# Altium PCB USB-NORA-W1.PcbDoc (part 3 of 3)
Units mm, origin at the board's own origin, x right, y up, seen from the top; angles counter-clockwise.
Board outline 61.5 x 18 mm, 4 copper layers (Top Layer, Layer 2, Layer 3, Bottom Layer), stack 2.472 mm thick; 80 components, 75 nets, 307 pads, 219 vias.
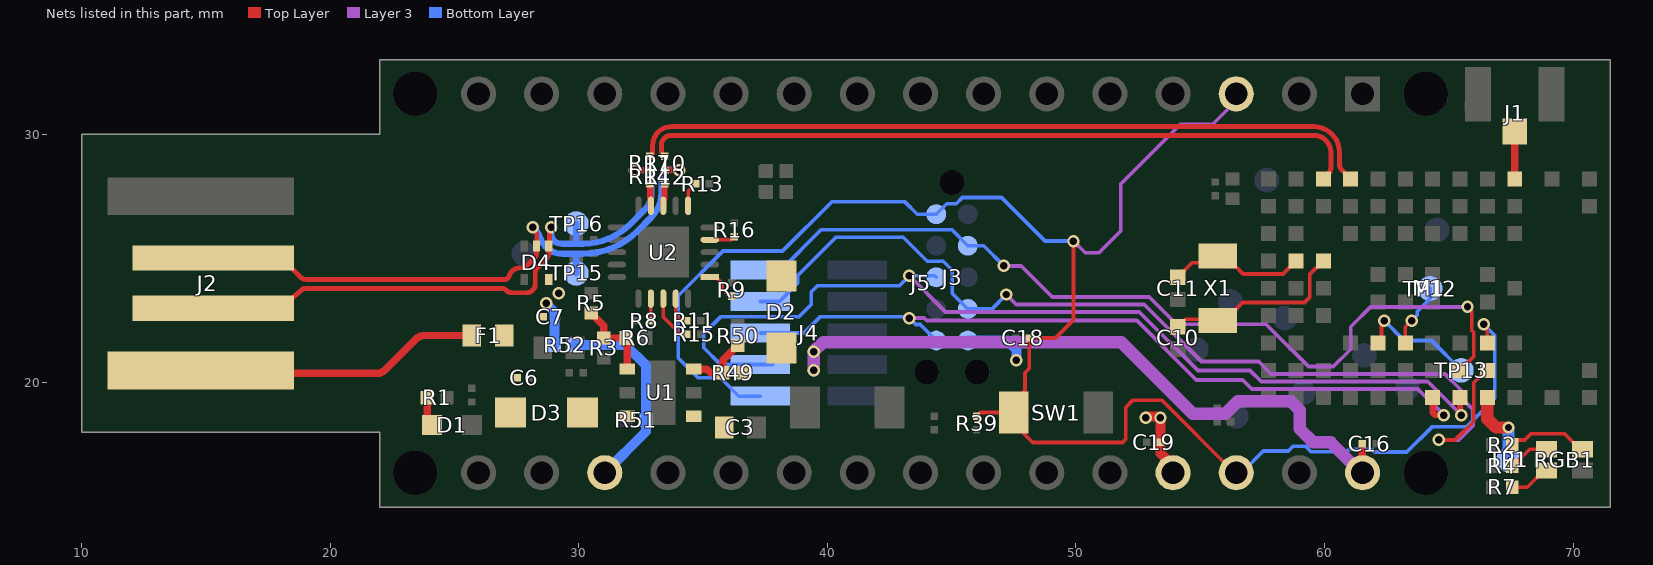
[diagram p4: the nets of this part, all layers, seen from the top]

## Via types
v1: diameter 0.5/0.5/0.5/0.5 (per signal layer), hole 0.3, Top Layer to Bottom Layer, tented both sides, 219 vias

## Nets (pads, with @x,y where several pads share a name; then routed paths per layer and width w, separated by ;. In a path a pad name is that pad's centre, name@x,y a point inside that pad or via, vN(x,y) a via of type N, cw(c..) or ccw(c..) an arc to the next point about the centre after c; other vN are vias at no path point) (continued)
GPIO47: M1.F3 TP12.1 | length 2.6
  Top Layer w0.15: M1.F3@63.25,21.6 63.25,22.25 v1(63.5,22.5)
  Bottom Layer w0.15: v1(63.5,22.5) 63.725,22.725 63.725,22.862 64.238,23.375 64.24,23.375 TP12.1@64.24,23.79
GPIO48: M1.E3 TP13.1 | length 4.9
  Top Layer w0.15: M1.E3@62.15,21.6 62.287,21.737 62.287,22.292 62.4,22.405 v1(62.4,22.5)
  Bottom Layer w0.15: v1(62.4,22.5) 63.2,21.7 64.3,21.7 TP13.1@65.5,20.5
IOREF: J5.18 R51.2 R52.2 | length 8.2
  Bottom Layer w0.4: R52.2@29.83,21.52 31.88,21.52 32.7,20.7 R51.2@32.7,18.5 32.7,18.032 J5.18@31.047,16.38
MTCK: J3.4 J4.4 M1.J2 | length 40.2
  Top Layer w0.15: v1(64.6,17.7) 65.25,17.7 66,18.45 66,20 66.275,20.275 66.325,20.275 66.5,20.45 M1.J2@66.5,20.5
  Layer 3 w0.15: v1(47.2,23.55) 47.6,23.15 52.75,23.15 55.05,20.85 57.35,20.85 57.85,20.35 64.85,20.35 65.5,19.7 65.5,19.4 65.975,18.925 65.975,18.275 65.4,17.7 v1(64.6,17.7)
  Bottom Layer w0.15: J4.4@37.3,23.27 38.07,23.27 38.8,24 38.8,24.3 40.35,25.85 43.05,25.85 44.015,24.885 44.665,24.885 45.025,24.525 45.025,23.595 J3.4@45.65,22.97 46.62,22.97 v1(47.2,23.55)
MTDI: J3.8 J4.8 M1.H1 | length 39.5
  Top Layer w0.25: M1.H1@65.45,19.4 65.45,18.75 v1(65.5,18.7)
  Layer 3 w0.15: v1(43.3,24.3) 44.75,22.85 52.55,22.85 54.907,20.493 57.007,20.493 57.45,20.05 64.15,20.05 v1(65.5,18.7)
  Bottom Layer w0.15: J4.8@37.8,20.73 35.698,20.73 35.025,21.403 35.025,21.975 35.7,22.65 38.85,22.65 39.35,23.15 39.35,23.65 39.6,23.9 42.9,23.9 v1(43.3,24.3) 44.32,24.3 J3.8@44.38,24.24
MTDO: J3.6 J4.6 M1.G1 | length 31.9
  Top Layer w0.25: M1.G1@64.35,19.4 64.35,18.8 64.45,18.7 v1(64.8,18.7)
  Layer 3 w0.15: v1(43.3,22.6) 43.9,22.6 44,22.5 52.45,22.5 54.835,20.115 56.71,20.115 57.075,19.75 63.75,19.75 v1(64.8,18.7)
  Bottom Layer w0.15: J4.6@37.3,22 39.05,22 39.7,22.65 43.25,22.65 v1(43.3,22.6) 43.555,22.345 43.735,22.345 44.256,21.824 J3.6@44.38,21.7
MTMS: J3.2 J4.2 M1.H2 | length 35.3
  Top Layer w0.15: M1.H2@65.45,20.5 66,21.05 66,22.028 65.925,22.103 65.925,22.875 v1(65.75,23.05)
  Layer 3 w0.15: v1(47.1,24.7) 47.8,24.7 49.05,23.45 52.95,23.45 54.05,22.35 57.65,22.35 59.35,20.65 60.35,20.65 61.05,21.35 61.05,22.25 61.85,23.05 v1(65.75,23.05)
  Bottom Layer w0.15: J4.2@37.8,24.54 38.14,24.54 39.75,26.15 45.01,26.15 J3.2@45.65,25.51 46.29,25.51 v1(47.1,24.7)
NetD1_1: D1.1 R1.1 | length 1.2
  Top Layer w0.3: R1.1@23.9,19.4 23.9,18.5 D1.1@24.1,18.3
NetR2_1: R2.1 RGB1.3 | length 3.3
  Top Layer w0.15: R2.1@67.55,17.5 67.55,17.515 67.735,17.7 68.05,17.7 68.3,17.95 69.65,17.95 70.275,17.325 RGB1.3@70.375,17.325
NetR3_2: R3.2 R5.2 R6.2 U1.4 | length 3.4
  Top Layer w0.3: R5.2@30.5,22.8 31,22.3 R3.2@31,21.8 R6.2@31.9,21.8 31.95,21.75 U1.4@31.95,20.55
NetR4_1: R4.1 RGB1.2 | length 1.7
  Top Layer w0.15: R4.1@67.55,16.65 67.575,16.65 68.25,17.325 RGB1.2@68.925,17.325
NetR7_1: R7.1 RGB1.1 | length 1.7
  Top Layer w0.15: R7.1@67.55,15.8 68.15,15.8 68.825,16.475 RGB1.1@68.925,16.475
NetR8_1: R8.1 U2.17 | length 0.9
  Top Layer w0.15: R8.1@32.9,22.5 U2.17@32.9,23.385
NetR9_1: R9.1 U2.1 | length 1.3
  Top Layer w0.15: U2.1@35.266,24.25 35.514,24.25 35.775,23.989 35.775,23.782 36.007,23.55 36.075,23.55 R9.1@36.15,23.475
NetR11_1: R11.1 U2.19 | length 1.2
  Top Layer w0.15: U2.19@33.9,23.385 33.9,22.72 34.12,22.5 R11.1@34.35,22.5
NetR13_1: R13.1 U2.6 | length 1
  Top Layer w0.15: U2.6@34.4,27.116 34.4,27.703 R13.1@34.7,28.003
NetR15_1: R15.1 U2.18 | length 2
  Top Layer w0.15: U2.18@33.4,23.385 33.4,22.64 34.09,21.95 R15.1@34.35,21.95
NetR16_1: R16.1 U2.4 | length 1
  Top Layer w0.15: U2.4@35.266,25.75 36.125,25.75 R16.1@36.25,25.875
NetR49_2: R49.2 R50.2 U1.3 | length 2.6
  Top Layer w0.3: U1.3@34.63,20.55 35.15,20.55 35.3,20.4 R49.2@35.8,20.4 35.8,20.9 35.9,21 R50.2@36.4,21.5
P_IN: C3.1 D2.C D3.C R49.1 U1.1 U1.6
RESET: C18.1 J3.10 J4.10 J5.3 J5.28 M1.J3 R39.1 SW1.1 | length 74.2
  Top Layer w0.15: R39.1@46,18.65 46.15,18.8 SW1.1@47.5,18.8 ; v1(49.9,25.7) 49.9,22.528 49.172,21.8 C18.1@48.125,21.8 48.125,20.575 47.95,20.4 47.95,19.7 47.5,19.25 SW1.1@47.5,18.8 ; J5.28@56.447,16.38 56.37,16.38 53.45,19.3 52.3,19.3 52,19 52,17.732 51.868,17.6 48.26,17.6 47.835,18.025 47.825,18.025 47.5,18.35 SW1.1@47.5,18.8 ; v1(66.4,22.35) 66.5,22.35 66.55,22.3 M1.J3@66.55,21.6
  Layer 3 w0.15: v1(49.9,25.7) 50.375,25.225 50.925,25.225 51.8,26.1 51.8,28 54.2,30.4 55.5,30.4 56.447,31.348 J5.3@56.447,31.62
  Bottom Layer w0.15: J4.10@37.3,19.46 36.44,19.46 35.7,20.2 34.8,20.2 34,21 34,23.5 35.8,25.3 38.2,25.3 40.175,27.275 43.125,27.275 43.62,26.78 J3.10@44.38,26.78 44.8,27.2 45.186,27.2 45.436,27.45 47,27.45 48.75,25.7 v1(49.9,25.7) ; J5.28@56.447,16.38 56.666,16.38 57.536,17.25 58.539,17.25 58.739,17.45 59.23,17.45 59.455,17.225 60.892,17.225 60.979,17.312 61.914,17.312 62.015,17.211 63.308,17.211 64.322,18.225 65.697,18.225 66.85,19.378 66.85,21.9 v1(66.4,22.35)
RF_PIN: J1.1 M1.K9 | length 1.9
  Top Layer w0.3: M1.K9@67.65,28.2 J1.1@67.65,30.1
USB_I_N: R14.2 U2.9 | length 0.9
  Top Layer w0.25: R14.2@32.85,28.003 32.875,27.978 32.875,27.382 32.9,27.357 U2.9@32.9,27.116
USB_I_P: R12.2 U2.8 | length 0.9
  Top Layer w0.25: U2.8@33.4,27.116 33.4,27.357 33.45,27.407 R12.2@33.45,28.003
USB_IOD_N: M1.D9 R17.1 | length 30.4
  Top Layer w0.2: R17.1@32.85,29.103 32.97,29.223 32.97,29.547 cw(c33.72,29.55) 33.72,30.3 59.576,30.3 cw(c59.573,29.273) 60.6,29.282 60.6,29.157 60.6,28.909 60.6,28.784 ccw(c60.9,28.784) 60.688,28.572 60.852,28.408 60.86,28.4 M1.D9@61.05,28.21
USB_IOD_P: M1.C9 R10.2 | length 29.2
  Top Layer w0.2: R10.2@33.45,29.103 33.4,29.153 33.393,29.161 cw(c33.62,29.357) 33.32,29.357 33.32,29.552 cw(c33.72,29.55) 33.718,29.95 59.573,29.95 cw(c59.572,29.272) 60.25,29.273 60.25,28.624 cw(c59.95,28.624) 60.228,28.51 60.22,28.492 cw(c60.035,28.568) 60.176,28.426 60.045,28.295 M1.C9@59.95,28.2
USB_N: D4.1 J2.2 R14.1 R17.2 TP16.1 | length 24.3
  Top Layer w0.2: J2.2@15.3,22.998 17.855,22.998 ccw(c17.855,23.297) 18.047,23.067 18.736,23.639 18.846,23.73 cw(c19.038,23.5) 19.038,23.8 26.876,23.8 cw(c26.876,23.5) 27.089,23.711 27.092,23.708 ccw(c27.304,23.92) 27.304,23.62 27.9,23.62 ccw(c27.9,23.97) 28.25,23.97 28.25,24.426 cw(c28.55,24.426) 28.337,24.637 28.713,25.013 ccw(c28.5,25.224) 28.8,25.224 D4.1@28.8,25.5 28.825,25.525 28.825,26.107 28.9,26.182 v1(28.9,26.25)
  Top Layer w0.25: v1(32.25,28.553) R14.1@32.85,28.553
  Bottom Layer w0.25: v1(28.9,26.25) 28.9,25.973 ccw(c29.275,25.973) 29.147,25.621 ccw(c29.323,26.108) 29.322,25.59 30.164,25.59 ccw(c30.163,28.298) 32.073,26.378 32.643,26.948 ccw(c31.944,27.644) 32.645,26.951 ccw(c31.944,27.644) 32.93,27.644 32.93,28.178 ccw(c32.555,28.178) 32.555,28.553 v1(32.25,28.553)
  Bottom Layer w0.254: 29.889,25.592 29.9,25.603 TP16.1@29.9,26.4
USB_P: D4.2 J2.3 R10.1 R12.1 TP15.1 | length 24.3
  Top Layer w0.2: J2.3@15.3,24.9 18.032,24.9 cw(c18.032,24.6) 18.245,24.812 18.692,24.365 18.809,24.247 ; 18.809,24.247 ccw(c19.021,24.46) 19.021,24.16 27.013,24.16 ccw(c27.013,24.36) 27.204,24.3 cw(c27.653,24.153) 27.276,24.438 cw(c27.653,24.153) 27.647,24.625 ccw(c27.636,25.08) 27.956,24.756 28.242,25.042 ccw(c28.1,25.183) 28.3,25.183 D4.2@28.3,25.5 ; D4.2@28.31,25.51 28.31,26.03
  Top Layer w0.25: R12.1@33.45,28.553 v1(34.05,28.553)
  Bottom Layer w0.25: v1(28.15,26.25) 28.299,26.101 cw(c28.033,25.836) 28.378,25.983 28.477,25.751 ccw(c29.323,26.108) 29.325,25.19 29.88,25.19 30.16,25.19 ; 30.161,25.19 ccw(c30.163,28.298) 32.356,26.096 32.927,26.667 ccw(c31.944,27.644) 32.928,26.668 ccw(c31.944,27.644) 33.33,27.644 33.33,28.195 cw(c33.705,28.195) 33.705,28.57 v1@34.033,28.57
  Bottom Layer w0.254: 29.88,25.188 29.9,25.168 TP15.1@29.9,24.4
VBUS: C6.1 C7.1 C19.1 D3.A D4.5 F1.1 J3.5 J5.27 R52.1 | length 7.4
  Top Layer w0.4: v1(52.8,18.6) 52.85,18.65 53.35,18.65 v1(53.4,18.6) C19.1@53.4,17.6 53.4,17.162 53.907,16.654 J5.27@53.907,16.38
  Bottom Layer w0.4: v1(28.7,23.2) 28.7,23.173 29.03,22.843 R52.1@29.03,21.52 ; J3.5@45.65,21.7 47.25,21.7 47.6,21.35 v1@47.6,20.927
  other v1: 47.6,20.9 29.2,23.6
VBUS_OUT: F1.2 J2.1 | length 11.5
  Top Layer w0.3: J2.1@14.795,20.384 21.898,20.384 ccw(c21.898,20.834) 22.215,20.515 23.469,21.769 cw(c23.786,21.45) 23.785,21.9 23.786,21.9 F1.2@25.7,21.9
VDD_SPI: M1.J1 TP1.1 | length 3.1
  Top Layer w0.5: M1.J1@66.55,19.4 66.55,18.55 66.9,18.2 v1(67.4,18.2)
  Bottom Layer w0.5: TP1.1@67.4,16.9 v1@67.4,18.173
VIN: C16.1 D2.A J5.30 | length 27.2
  Top Layer w0.3: C16.1@61.525,17.55 61.525,16.383 J5.30@61.527,16.38
  Top Layer w0.45: J5.30@61.46,16.38 J5.30@61.527,16.38
  Layer 3 w0.5: v1(39.45,20.5) v1(39.45,21.25) 39.825,21.625 51.825,21.625 54.7,18.75 56,18.75 56.5,19.25 58.65,19.25 59,18.9 59,18.15 59.55,17.6 60.25,17.6 61.47,16.38 J5.30@61.527,16.38
XTAL_32K_N: C11.1 M1.B6 X1.2 | length 5.6
  Top Layer w0.15: C11.1@54.1,24.25 54.682,24.832 55.432,24.832 X1.2@55.7,25.1 56.125,24.675 56.425,24.675 56.725,24.375 58.325,24.375 M1.B6@58.85,24.9
XTAL_32K_P: C10.1 M1.C6 X1.1 | length 7.5
  Top Layer w0.15: C10.1@54.1,22.25 54.4,22.55 55.65,22.55 X1.1@55.7,22.5 55.975,22.5 56.7,23.225 59.193,23.225 59.4,23.432 59.4,24.35 M1.C6@59.95,24.9
pads on no net: D4.4 J3.7 J3.9 J3.A J3.B J3.C J4.7 M1.A4 M1.B5 M1.B9 M1.C5 M1.D7 M1.G4 M1.G5 M1.G7 M1.J4 M1.J5 M1.J7 M1.K1 U2.2 U2.5 U2.7 U2.14 U2.15 U2.16

## Polygon pours and split planes (outlines as drawn)
GND on Top Layer "GND_TOP" (solid, remove dead copper, pour order 92): 18,28.25 18,26.75 22,26.75 22,17.9 22,15.189 71.395,15.189 71.395,32.939 22,32.939 22,29.9 22,28.25
3V3 on Top Layer "3V3_TOP_08" (solid, pour order 2): 46.2,25.2 46.05,25.05 42.3,25.05 40.9,26.45 40.9,27.05 41.25,27.4 45.3,27.4 45.8,27.9 52.2,27.9 52.425,27.675 56.56,27.675 56.785,27.45 58.05,27.45 58.05,26.67 58.27,26.45 59.15,26.45 59.15,25.651 59.149,25.65 56.9,25.65 56.58,25.97 52.23,25.97 52,26.2 48.9,26.2 47.9,25.2
VIN on Top Layer "VDD_SPI_L4_7" (solid, pour order 101): 37.55,24.925 37.55,23.65 39.05,22.15 39.05,20.45 39.25,20.25 39.8,20.25 40,20.45 40,22.4 38.75,23.65 38.75,24.925
P_IN on Top Layer "P_IN_TOP" (solid, pour order 8): 36.34,19.54 35.72,18.92 35.375,18.92 34.27,18.92 34.27,18.26 34.14,18.13 32.43,18.13 32.31,18.25 32.31,18.92 31.58,18.92 31.5,19 31.175,19 30.775,19.4 29.525,19.4 29.525,18.2 30.075,17.65 31.3,17.65 31.45,17.5 36,17.5 36.225,17.725 36.225,18.625 36.5,18.9 36.9,18.9 37.1,19.1 37.1,19.5 37.12,19.52 37.12,19.96 37.86,20.7 38.675,20.7 38.75,20.775 38.75,22.025 37.55,22.025 37.2,21.675 37.2,21.3 36.7,20.8 36.465,20.8 36.34,20.675
GND on Top Layer "VDD_SPI_L4_7" (solid, pour order 97): 28.975,22.8 29.8,22.8 30,22.6 30,22.3 29.8,22.1 29.3,22.1 28.925,21.725 28.925,20.875 29.1,20.7 29.625,20.7 29.775,20.55 29.775,20.175 28.9,19.3 28.6,19.3 27.9,20 27.9,21.575 28.325,22 28.5,22 28.975,22.475
VBUS on Top Layer "VDD_SPI_L4_7" (solid, pour order 96): 28.736,24.375 28.95,24.375 29.5,23.825 29.5,23.3 29.3,23.1 29.025,23.1 28.725,22.8 28.725,22.525 28.4,22.2 27.8,22.2 27.675,22.075 27.675,20.625 27.675,19.6 27.875,19.4 27.875,18.2 26.625,18.2 26.4,18.425 26.4,19.3 26.2,19.5 26.2,21.025 26.625,21.45 26.625,22.35 26.65,22.35 27.3,23 28,23 28.65,23.65 28.65,24.289
3V3 on Top Layer "3V3_TOP_01" (solid, pour order 6): 30.4,21.7 30.25,21.85 29.59,21.85 29.475,21.735 29.475,20.95 29.75,20.95 30,20.7 30,19.9 30.35,19.55 30.925,19.55 31.175,19.3 32.3,19.3 32.35,19.35 32.35,19.85 32.3,19.9 31.67,19.9 31.55,20.02 31.55,20.22 31.42,20.35 31.42,21.115 31.275,21.26 30.54,21.26 30.4,21.4
VBUS on Top Layer "VBUS_Arduino" (solid, pour order 27): 53.45,18.95 53.75,18.65 53.75,18.175 54.637,17.288 54.637,15 53.285,15 53.175,15.11 53.175,17.875 53.05,18 52.55,18 52.475,18.075 52.475,18.8 52.625,18.95
VBUS_OUT on Top Layer "VBUS_OUT" (solid, pour order 3): 23.75,20.9 25.525,20.9 26.075,21.45 26.075,22.425 26,22.5 21.95,22.5 20.7,21.25 18.057,21.25 18.057,19.75 22.6,19.75
3V3 on Top Layer "3V3_TOP_03" (solid, pour order 9): 31.5,29.1 31.25,29.35 29.8,29.35 29.25,28.8 29.25,28.25 30.2,27.3 30.185,26.615 29.6,26.03 29.6,25.44 30.23,25.44 30.34,25.55 30.8,25.55 30.879,25.629 31.831,25.629 31.91,25.707 31.91,26.47 32.18,26.74 32.45,26.74 32.52,26.81 32.52,27.42 32.45,27.49 32,27.49 31.5,27.99
GPIO38 on Top Layer "Top Layer-SPI-F_WP_NANO" (solid, pour order 91): 52.074,31.62 52.074,33 50.66,33 50.66,31.62
GPIO45/UART0-RTS on Top Layer "Top Layer-UART0-RTS_NANO" (solid, pour order 90): 31.754,31.62 31.754,33 30.34,33 30.34,31.62
GPIO14 on Top Layer "Top Layer-SPI-F_DQS_NANO" (solid, pour order 89): 44.454,31.62 44.454,33 43.04,33 43.04,31.62
GPIO43/UART0-TXD_NANO on Top Layer "Top Layer-UART0-TXD_NANO_IN" (solid, pour order 88): 62.234,31.62 62.234,33 60.82,33 60.82,31.62
GND on Top Layer "Top Layer-GND 1" (solid, pour order 87): 54.614,31.62 54.614,33 53.2,33 53.2,31.62
GPIO1/UART0-DTR on Top Layer "Top Layer-UART0-DTR_NANO" (solid, pour order 86): 36.834,31.62 36.834,33 35.42,33 35.42,31.62
GPIO33 on Top Layer "Top Layer-SPI-F_HD_NANO" (solid, pour order 85): 46.994,31.62 46.994,33 45.58,33 45.58,31.62
GPIO6/UART0-CTS on Top Layer "Top Layer-UART0-CTS_NANO" (solid, pour order 84): 34.294,31.62 34.294,33 32.88,33 32.88,31.62
GPIO37 on Top Layer "Top Layer-SPI-F_Q_NANO" (solid, pour order 83): 26.674,31.62 26.674,33 25.26,33 25.26,31.62
GPIO7/UART0-DSR on Top Layer "Top Layer-UART0-DSR_NANO" (solid, pour order 82): 39.374,31.62 39.374,33 37.96,33 37.96,31.62
RESET on Top Layer "Top Layer-RESET_N 1" (solid, pour order 81): 57.154,31.62 57.154,33 55.74,33 55.74,31.62
GPIO35 on Top Layer "Top Layer-SPI-F_D_NANO" (solid, pour order 80): 29.214,31.62 29.214,33 27.8,33 27.8,31.62
GPIO21 on Top Layer "Top Layer-GPIO21_NANO" (solid, pour order 79): 49.534,31.62 49.534,33 48.12,33 48.12,31.62
GPIO44/UART0-RXD_NANO on Top Layer "Top Layer-UART0-RXD_NANO_IN" (solid, pour order 78): 59.694,31.62 59.694,33 58.28,33 58.28,31.62
GPIO34 on Top Layer "Top Layer-SPI-F_CS0_NANO" (solid, pour order 77): 41.914,31.62 41.914,33 40.5,33 40.5,31.62
GPIO12 on Top Layer "Top Layer-SPI-F_IO6" (solid, pour order 61): 48.12,16.38 48.12,15 49.534,15 49.534,16.38
GND on Top Layer "Top Layer-GND" (solid, pour order 59): 58.28,16.38 58.28,15 59.694,15 59.694,16.38
GPIO13 on Top Layer "Top Layer-GPIO9" (solid, pour order 58): 37.96,16.38 37.96,15 39.374,15 39.374,16.38
GPIO36 on Top Layer "Top Layer-SPI-F_CLK_NANO" (solid, pour order 57): 25.26,16.38 25.26,15 26.674,15 26.674,16.38
GPIO18/I2C-SCL on Top Layer "Top Layer-I2C-SCL_NANO" (solid, pour order 56): 45.58,16.38 45.58,15 46.994,15 46.994,16.38
RESET on Top Layer "Top Layer-RESET_N" (solid, pour order 54): 55.74,16.38 55.74,15 57.154,15 57.154,16.38
GPIO4 on Top Layer "Top Layer-GPIO4" (solid, pour order 53): 32.88,16.38 32.88,15 34.294,15 34.294,16.38
GPIO9 on Top Layer "Top Layer-SPI-F_IO7" (solid, pour order 52): 35.42,16.38 35.42,15 36.834,15 36.834,16.38
GPIO17/I2C-SDA on Top Layer "Top Layer-I2C-SDA_NANO" (solid, pour order 51): 43.04,16.38 43.04,15 44.454,15 44.454,16.38
GPIO10 on Top Layer "Top Layer-SPI-F_IO4" (solid, pour order 50): 50.66,16.38 50.66,15 52.074,15 52.074,16.38
IOREF on Top Layer "Top Layer-IOREF" (solid, pour order 49): 30.341,16.38 30.341,15 31.755,15 31.755,16.38
GPIO11 on Top Layer "Top Layer-SPI-F_IO5" (solid, pour order 48): 40.5,16.38 40.5,15 41.914,15 41.914,16.38
VIN on Top Layer "Top Layer-VIN" (solid, pour order 47): 60.82,16.38 60.82,15 62.234,15 62.234,16.38
3V3 on Top Layer "3V3_TOP_02" (solid, pour order 7): 26.2,18.2 26.2,19.025 25.85,19.375 25.475,19.375 25.3,19.2 25.3,17.7 25.7,17.3 26.2,17.3 26.3,17.2 26.8,17.2 27.8,16.2 27.8,15 29.217,15 29.217,16.933 28.25,17.9 26.5,17.9
3V3 on Top Layer "3V3_TOP_04" (solid, pour order 10): 34.279,23.689 34.35,23.76 35.25,23.76 35.57,23.44 35.57,23.19 35.39,23.01 34.35,23.01 34.279,23.081 34.279,23.489
no net on Top Layer "Top Layer-No Net 1" (solid, pour order 60): 27.8,16.38 27.8,15 29.214,15 29.214,16.38
no net on Top plating "NONET_L-01_P-001" (solid): 10,30 10,18 18.6,18 18.6,26.716 18.6,30
GND on Layer 3 "GND_L3" (solid, remove dead copper, pour order 93): 22.035,29.9 10,29.9 10,17.9 22,17.9 22,17.707 22,15.175 22.035,15.14 71.285,15.14 71.285,32.89 22.035,32.89
3V3 on Layer 3 "VDD_SPI_L4_7" (solid, pour order 98): 31.5,29.4 31.7,29.2 31.7,28.3 35.1,24.9 38.75,24.9 41.15,27.3 46.9,27.3 47.25,26.95 47.25,26.25 46.05,25.05 41.85,25.05 39.6,22.8 34,22.8 29.2,27.6 29.2,28.9 29.7,29.4
VBUS on Layer 3 "VDD_SPI_L4_7" (solid, pour order 100): 52,20.75 51.55,21.2 46.45,21.2 46,20.75 44.05,20.75 42.85,19.55 33.7,19.55 29.3,23.95 28.5,23.95 27.8,23.25 27.8,21.05 30.85,18 47.15,18 48.15,19 49.85,19 50.5,18.35 53.7,18.35 53.85,18.5 53.85,18.9
GND on Bottom Layer "GND_BOT" (solid, remove dead copper, pour order 94): 22.055,17.955 22,17.9 22.055,17.9 22.055,15.1 71.305,15.1 71.305,32.85 22.055,32.85
3V3 on Bottom Layer "VDD_SPI_L4_7" (solid, pour order 95): 27.65,18.9 27,19.55 27,24.4 26.7,24.7 26.7,26.7 27.9,27.9 30.5,27.9 31.45,28.85 31.45,29.25 31.1,29.6 26.8,29.6 25,27.8 25,18.8 28.127,15.673 28.8,15.673 29.2,16.073 29.2,16.5 30.5,17.8 31.8,17.8 32.16,18.16 32.16,19.64 31.5,20.3 30.5,20.3 29.1,18.9
GPIO44/UART0-RXD_NANO on Bottom Layer "Bottom Layer-UART0-RXD_NANO_IN" (solid, pour order 68): 59.694,31.62 59.694,33 58.28,33 58.28,31.62
GPIO38 on Bottom Layer "Bottom Layer-SPI-F_WP_NANO" (solid, pour order 67): 52.074,31.62 52.074,33 50.66,33 50.66,31.62
GPIO21 on Bottom Layer "Bottom Layer-GPIO21_NANO" (solid, pour order 70): 49.534,31.62 49.534,33 48.12,33 48.12,31.62
GPIO33 on Bottom Layer "Bottom Layer-SPI-F_HD_NANO" (solid, pour order 74): 46.994,31.62 46.994,33 45.58,33 45.58,31.62
GPIO14 on Bottom Layer "Bottom Layer-SPI-F_DQS_NANO" (solid, pour order 64): 44.454,31.62 44.454,33 43.04,33 43.04,31.62
GPIO34 on Bottom Layer "Bottom Layer-SPI-F_CS0_NANO" (solid, pour order 69): 41.914,31.62 41.914,33 40.5,33 40.5,31.62
GPIO36 on Bottom Layer "Bottom Layer-SPI-F_CLK_NANO" (solid, pour order 33): 25.26,16.38 25.26,15 26.674,15 26.674,16.38
GPIO7/UART0-DSR on Bottom Layer "Bottom Layer-UART0-DSR_NANO" (solid, pour order 73): 39.374,31.62 39.374,33 37.96,33 37.96,31.62
GPIO6/UART0-CTS on Bottom Layer "Bottom Layer-UART0-CTS_NANO" (solid, pour order 66): 34.294,31.62 34.294,33 32.88,33 32.88,31.62
GPIO45/UART0-RTS on Bottom Layer "Bottom Layer-UART0-RTS_NANO" (solid, pour order 72): 31.754,31.62 31.754,33 30.34,33 30.34,31.62
GPIO1/UART0-DTR on Bottom Layer "Bottom Layer-UART0-DTR_NANO" (solid, pour order 63): 36.834,31.62 36.834,33 35.42,33 35.42,31.62
GPIO18/I2C-SCL on Bottom Layer "Bottom Layer-I2C-SCL_NANO" (solid, pour order 35): 45.58,16.38 45.58,15 46.994,15 46.994,16.38
GPIO17/I2C-SDA on Bottom Layer "Bottom Layer-I2C-SDA_NANO" (solid, pour order 44): 43.04,16.38 43.04,15 44.454,15 44.454,16.38
GPIO35 on Bottom Layer "Bottom Layer-SPI-F_D_NANO" (solid, pour order 76): 29.214,31.62 29.214,33 27.8,33 27.8,31.62
GND on Bottom Layer "Bottom Layer-GND" (solid, pour order 75): 54.614,31.62 54.614,33 53.2,33 53.2,31.62
RESET on Bottom Layer "Bottom Layer-RESET_N" (solid, pour order 71): 57.154,31.62 57.154,33 55.74,33 55.74,31.62
GPIO37 on Bottom Layer "Bottom Layer-SPI-F_Q_NANO" (solid, pour order 65): 26.674,31.62 26.674,33 25.26,33 25.26,31.62
GPIO43/UART0-TXD_NANO on Bottom Layer "Bottom Layer-UART0-TXD_NANO_IN" (solid, pour order 62): 62.234,31.62 62.234,33 60.82,33 60.82,31.62
GPIO4 on Bottom Layer "Bottom Layer-GPIO4" (solid, pour order 46): 32.88,16.38 32.88,15 34.294,15 34.294,16.38
VIN on Bottom Layer "Bottom Layer-VIN" (solid, pour order 45): 60.82,16.38 60.82,15 62.234,15 62.234,16.38
IOREF on Bottom Layer "Bottom Layer-IOREF" (solid, pour order 43): 30.34,16.38 30.34,15 31.754,15 31.754,16.38
GPIO10 on Bottom Layer "Bottom Layer-SPI-F_IO4" (solid, pour order 42): 50.66,16.38 50.66,15 52.074,15 52.074,16.38
GND on Bottom Layer "Bottom Layer-GND 1" (solid, pour order 41): 58.28,16.38 58.28,15 59.694,15 59.694,16.38
GPIO11 on Bottom Layer "Bottom Layer-SPI-F_IO5" (solid, pour order 40): 40.5,16.38 40.5,15 41.914,15 41.914,16.38
GPIO12 on Bottom Layer "Bottom Layer-SPI-F_IO6" (solid, pour order 39): 48.12,16.38 48.12,15 49.534,15 49.534,16.38
RESET on Bottom Layer "Bottom Layer-RESET_N 1" (solid, pour order 38): 55.74,16.38 55.74,15 57.154,15 57.154,16.38
3V3 on Bottom Layer "Bottom Layer-3V3" (solid, pour order 37): 27.8,16.38 27.8,15 29.214,15 29.214,16.38
GPIO9 on Bottom Layer "Bottom Layer-SPI-F_IO7" (solid, pour order 36): 35.42,16.38 35.42,15 36.834,15 36.834,16.38
GPIO13 on Bottom Layer "Bottom Layer-GPIO9" (solid, pour order 34): 37.96,16.38 37.96,15 39.374,15 39.374,16.38
VBUS on Bottom Layer "Bottom Layer-VBUS" (solid, pour order 32): 53.2,16.38 53.2,15 54.614,15 54.614,16.38
no net on Bottom Solder "NONET_L-01_P-001" (solid): 18.531,29.9 10,29.9 10,17.9 17.315,17.9 18.531,17.9
GPIO9 on Bottom Solder (solid): 35.42,16.38 35.42,15 36.834,15 36.834,16.38
no net on Bottom Solder (solid): 26.674,31.62 26.674,33 25.26,33 25.26,31.62
no net on Bottom Solder (solid): 29.214,31.62 29.214,33 27.8,33 27.8,31.62
no net on Bottom Solder (solid): 31.754,31.62 31.754,33 30.34,33 30.34,31.62
no net on Bottom Solder (solid): 34.294,31.62 34.294,33 32.88,33 32.88,31.62
no net on Bottom Solder (solid): 36.834,31.62 36.834,33 35.42,33 35.42,31.62
no net on Bottom Solder (solid): 39.374,31.62 39.374,33 37.96,33 37.96,31.62
no net on Bottom Solder (solid): 41.914,31.62 41.914,33 40.5,33 40.5,31.62
no net on Bottom Solder (solid): 44.454,31.62 44.454,33 43.04,33 43.04,31.62
no net on Bottom Solder (solid): 46.994,31.62 46.994,33 45.58,33 45.58,31.62
no net on Bottom Solder (solid): 49.534,31.62 49.534,33 48.12,33 48.12,31.62
no net on Bottom Solder (solid): 52.074,31.62 52.074,33 50.66,33 50.66,31.62
GND on Bottom Solder (solid): 54.614,31.62 54.614,33 53.2,33 53.2,31.62
RESET on Bottom Solder (solid): 57.154,31.62 57.154,33 55.74,33 55.74,31.62
no net on Bottom Solder (solid): 59.694,31.62 59.694,33 58.28,33 58.28,31.62
no net on Bottom Solder (solid): 62.234,31.62 62.234,33 60.82,33 60.82,31.62
VIN on Bottom Solder (solid): 60.82,16.38 60.82,15 62.234,15 62.234,16.38
GND on Bottom Solder (solid): 58.28,16.38 58.28,15 59.694,15 59.694,16.38
RESET on Bottom Solder (solid): 55.74,16.38 55.74,15 57.154,15 57.154,16.38
VBUS on Bottom Solder (solid): 53.2,16.38 53.2,15 54.614,15 54.614,16.38
GPIO10 on Bottom Solder (solid): 50.66,16.38 50.66,15 52.074,15 52.074,16.38
GPIO12 on Bottom Solder (solid): 48.12,16.38 48.12,15 49.534,15 49.534,16.38
no net on Bottom Solder (solid): 45.58,16.38 45.58,15 46.994,15 46.994,16.38
no net on Bottom Solder (solid): 43.04,16.38 43.04,15 44.454,15 44.454,16.38
GPIO11 on Bottom Solder (solid): 40.5,16.38 40.5,15 41.914,15 41.914,16.38
GPIO13 on Bottom Solder (solid): 37.96,16.38 37.96,15 39.374,15 39.374,16.38
GPIO4 on Bottom Solder (solid): 32.88,16.38 32.88,15 34.294,15 34.294,16.38
IOREF on Bottom Solder (solid): 30.341,16.38 30.341,15 31.755,15 31.755,16.38
3V3 on Bottom Solder (solid): 27.8,16.38 27.8,15 29.214,15 29.214,16.38
3V3 on Bottom Solder (solid): 25.26,16.38 25.26,15 26.674,15 26.674,16.38
no net on Top Solder "NONET_L-01_P-001" (solid): 10,29.9 18.5,29.9 18.5,17.9 10,17.9
GND on Top Solder (solid): 54.614,31.62 54.614,33 53.2,33 53.2,31.62
no net on Top Solder (solid): 49.534,31.62 49.534,33 48.12,33 48.12,31.62
no net on Top Solder (solid): 46.994,31.62 46.994,33 45.58,33 45.58,31.62
no net on Top Solder (solid): 44.454,31.62 44.454,33 43.04,33 43.04,31.62
no net on Top Solder (solid): 41.914,31.62 41.914,33 40.5,33 40.5,31.62
no net on Top Solder (solid): 36.834,31.62 36.834,33 35.42,33 35.42,31.62
no net on Top Solder (solid): 39.374,31.62 39.374,33 37.96,33 37.96,31.62
no net on Top Solder (solid): 34.294,31.62 34.294,33 32.88,33 32.88,31.62
no net on Top Solder (solid): 26.674,31.62 26.674,33 25.26,33 25.26,31.62
no net on Top Solder (solid): 31.754,31.62 31.754,33 30.34,33 30.34,31.62
no net on Top Solder (solid): 29.214,31.62 29.214,33 27.8,33 27.8,31.62
no net on Top Solder (solid): 62.234,31.62 62.234,33 60.82,33 60.82,31.62
no net on Top Solder (solid): 59.694,31.62 59.694,33 58.28,33 58.28,31.62
RESET on Top Solder (solid): 57.154,31.62 57.154,33 55.74,33 55.74,31.62
no net on Top Solder (solid): 52.074,31.62 52.074,33 50.66,33 50.66,31.62
3V3 on Top Solder (solid): 27.8,16.38 27.8,15 29.214,15 29.214,16.38
GPIO9 on Top Solder (solid): 35.42,16.38 35.42,15 36.834,15 36.834,16.38
GPIO13 on Top Solder (solid): 37.96,16.38 37.96,15 39.374,15 39.374,16.38
no net on Top Solder (solid): 43.04,16.38 43.04,15 44.454,15 44.454,16.38
no net on Top Solder (solid): 45.58,16.38 45.58,15 46.994,15 46.994,16.38
GPIO12 on Top Solder (solid): 48.12,16.38 48.12,15 49.534,15 49.534,16.38
GPIO10 on Top Solder (solid): 50.66,16.38 50.66,15 52.074,15 52.074,16.38
GPIO11 on Top Solder (solid): 40.5,16.38 40.5,15 41.914,15 41.914,16.38
VBUS on Top Solder (solid): 53.2,16.38 53.2,15 54.614,15 54.614,16.38
GND on Top Solder (solid): 58.28,16.38 58.28,15 59.694,15 59.694,16.38
VIN on Top Solder (solid): 60.82,16.38 60.82,15 62.234,15 62.234,16.38
RESET on Top Solder (solid): 55.74,16.38 55.74,15 57.154,15 57.154,16.38
GPIO4 on Top Solder (solid): 32.88,16.38 32.88,15 34.294,15 34.294,16.38
no net on Top Solder (solid): 25.26,16.38 25.26,15 26.674,15 26.674,16.38
IOREF on Top Solder (solid): 30.341,16.38 30.341,15 31.755,15 31.755,16.38
GND on Layer 2 "GND_L2" (solid, remove dead copper, pour order 26): 22.095,29.9 10,29.9 10,17.9 22,17.9 22,15 22.095,15.095 22.095,15.11 71.345,15.11 71.345,32.86 22.095,32.86

## Other copper
Top Layer:
  pour cut-out: 37.4,23.7 37.4,22.15 37.45,22.1 38.85,22.1 38.85,22.25
  pour cut-out: 64.35,25.55 64.35,24.35 65.85,24.35 65.85,25.55
  pour cut-out: 50.9,20.8 50.9,20.2 50.95,20.15 51.6,20.15 51.6,20.4 51.05,20.95
  pour cut-out: 50.35,25.55 50.45,25.45 50.45,22.35 50.05,22.35 50.05,22.4 50.05,25.45 50.15,25.55
  pour cut-out: 47.6,21.3 48,21.3 48,21.1 47.95,21.05 47.6,21.05
  pour cut-out: 35.286,28.153 35.289,28.15 37.25,28.15 37.25,27.15 36.75,26.65 36.35,26.65 35.85,27.15 35.85,27.75 35.3,27.75 35.25,27.8
  pour cut-out: 34.5,28.3 33.7,28.3 33.65,28.25 33.65,27.5 34.264,27.5 34.314,27.45 34.5,27.636
  pour cut-out: 36,21.91 37.135,21.91 37.375,22.15 37.6,22.15 37.123,21.673 37.05,21.673 37.05,21.3 36.875,21.125 36.025,21.125
  pour cut-out: 63,32.7 63.05,32.65 63.05,31.7 64.6,31.7 64.95,32.05 64.95,32.75 64.85,32.85 63.1,32.85
  pour cut-out: 33,22.2 33.578,22.2 34.1,21.678 34.1,20.99 34.472,20.618 35.604,20.618 36.226,21.24 36,21.466 36,22.9 35.8,23.1 35.6,22.9 33.15,22.9 33,22.75
  pour cut-out: 43.75,21.3 43.95,21.1 44.95,21.1 46.137,21.1 48.3,21.1 48.3,20.815 47.9,20.415 47.9,18.85 47.05,18 43.55,18 42.55,19 42.55,21 42.85,21.3
  pour cut-out: 64.2,17.43 63.63,17.43 63.05,16.85 63.05,15.4 63.25,15.2 64.75,15.2 65.35,15.8 65.35,17.3 65.2,17.45
  pour cut-out: 65.9,17.3 64.2,17.3 64.2,19.05 63.9,19.35 63.9,21.15 63.6,21.15 63.25,21.5 63.25,22.65 63.5,22.9 66.9,22.9 67,22.8 67,19.112 65.9,18.012 65.9,17.8
  pour cut-out: 58.4,17.8 58.579,17.8 59.95,17.8 60.45,18.3 63.05,18.3 63.7,18.95 63.7,20.95 61.5,20.95 61.5,21.65 61.2,21.95 60.1,21.95 59.9,21.75 59.9,20.05 58.7,20.05 58.4,19.75
  pour cut-out: 57,21.4 55.7,21.4 55.7,22.5 56.5,23.3 56.5,24.7 55.45,25.75 54.775,25.75 54.775,25.875 54.8,25.9 56.55,25.9 56.85,25.6 56.9,25.65 59.299,25.65 59.312,25.664 59.65,25.326 59.65,24.65 59.288,24.288 59.288,21.666 59.018,21.396
  pour cut-out: 26.012,22.65 26.75,22.65 26.75,22.55 26.55,22.35 26.55,21.5 26.05,21 26.05,20.75 25.55,20.75 25.5,20.8 26.15,21.45 26.15,22.512
  pour cut-out: 52.75,17.85 51.8,17.85 51.8,19.9 56.525,19.9 56.525,17.05 54.8,17.05 54.7,17.15 54.7,17.3 53.8,18.2 53.8,18.65 53.45,19 52.55,19 52.4,18.85 52.4,18.05 52.5,17.95 52.75,17.95
  pour cut-out: 69.42,17.8 69.54,17.8 69.54,17.78 69.86,17.46 69.86,16 69.44,16 69.44,17.75 69.42,17.77
  pour cut-out: 32.51,20.95 32.14,20.95 31.66,20.47 31.66,20.05 32.26,20.05 32.47,19.84 32.47,19.35 32.29,19.17 31.68,19.17 31.68,19.01 31.67,19 31.72,18.95 32.46,18.95 32.51,19
  pour cut-out: 34.139,23.01 35.552,23.01 35.732,23.19 35.69,23.232 35.69,23.542 35.783,23.542 36,23.325 36,22.9 35.7,22.6 35.1,22.6 35.05,22.65 34.15,22.65 33.921,22.879
  pour cut-out: 34.761,26.356 34.761,25.644 34.932,25.473 35.681,25.473 35.775,25.38 35.775,25.161 35.62,25.006 34.911,25.006 34.746,24.84 34.746,23.946 34.689,23.889 32.294,23.889 31.8,23.394 31.8,23.2 32.346,23.2 32.9,23.754 35.346,23.754 35.6,23.5 36.175,24.075 36.175,26.225 35.895,26.505 34.911,26.505
  pour cut-out: 32.4,26.746 34.64,26.746 34.485,26.59 32.463,26.59 32.45,26.578
  pour cut-out: 68.6,32.7 68.6,27.75 66.7,27.75 66.7,32.7
  pour cut-out: 61.7,26.925 61.975,26.65 65.743,26.65 66.7,27.607 66.7,30.15 62.5,30.15 61.7,29.35
  pour cut-out: 61.5,28.487 61.5,26.125 61.35,25.975 61.325,26 60.05,26 60.05,26.25 59.55,26.75 59.55,28
  pour cut-out: 24.5,15.25 24.5,17.2 24.5,17.35 23.975,17.35 22.25,17.35 22.25,15.25
  pour cut-out: 24.5,32.75 24.5,30.6 22.25,30.6 22.25,32.75
  text "1" at 23.35,26.15 h0.6
Layer 3:
  pour cut-out: 52.55,28.75 51.955,28.155 51.805,28.155 51.55,27.9 51.4,28.05 51.4,28.7 51.45,28.75
  pour cut-out: 65.8,24.45 66.15,24.1 66.15,22.95 63.7,20.5 55.3,20.5 53.2,22.6 53.2,24.35 54.25,25.4 58.6,25.4 59.35,24.65 60.849,24.65 61.003,24.496 61,24.492 61,24 61.8,23.2 65.45,23.2 65.4,23.25 65.4,24.1 65.38,24.1 65.3,24.18 65.3,24.45
  pour cut-out: 66.75,22.35 66.75,19.45 67.8,18.4 67.8,17.8 66.5,17.8 66.4,17.7 66.4,16.45 66,16.05 65.65,16.05 65.5,16.2 65.5,16.55 66.1,17.15 66.1,19.15 65.85,19.4 65.85,22.35
  text "3" at 23.25,26.15 h0.6
Layer 2:
  text "2" at 23.25,26.15 h0.6
Bottom Layer:
  pour cut-out: 43.7,24.15 43.7,22.38 44.13,21.95 44.8,21.95 44.8,24.131 44.772,24.159
  pour cut-out: 61.25,24.7 62.85,24.7 63.132,24.982 63.132,27.35 62,27.35 60.1,29.25 57.35,29.25 54.311,26.211 54.311,24.4 59.944,24.4 60.294,24.05 60.9,24.05 60.9,24.35
  pour cut-out: 65.6,23.35 65.6,23.75 66.25,23.75 67.05,22.95 67.05,21.378 66.822,21.15 64.65,21.15 63.65,22.15 63.65,22.9 64.1,23.35
  pour cut-out: 40,19 36.1,19 36.1,24.92 40.001,24.92
  text "4" at 23.25,26.15 h0.6

## Silkscreen, mask and mechanical layers (free items; w line width, h text height)
Top Overlay:
  text "X1" at 54.15,25.95 h0.8
  text "u" at 40.489,24.604 h3.81
  text "www.u-blox.com" at 44.1,23.55 h0.8
  text "USB-NORA-W1/2 vB" at 41,22.364 h0.8
  text "BOOT" at 39.85,20.8 h0.8
  text "RESET" at 48.1,20.5 h0.8
Bottom Overlay:
  lines w0.15: 42.25,17.85 41.6,17.2 ; 41.6,17.2 41.8,17.2 41.6,17.4 41.6,17.2
  text "3" at 67.15,31.15 h0.8 r270
  text "1" at 62.35,30.45 h0.8 r270
  text "15" at 24.35,29.85 h0.8 r270
  text "GND" at 53.55,28.35 h0.8 r270
  text "RST" at 55.85,28.35 h0.8 r270
  text "16" at 29.55,27.35 h0.8 r270
  text "GPIO1" at 35.65,27.15 h0.8 r270
  text "11" at 63.75,27.15 h0.8 r270
  text "GPIO6" at 33.15,26.85 h0.8 r270
  text "GPI07" at 38.15,26.85 h0.8 r270
  text "2" at 57.05,26.65 h0.8 r270
  text "GPIO21" at 48.45,26.35 h0.8 r270
  text "GPIO14" at 42.65,26.25 h0.8 r270
  text "GPIO34" at 40.75,26.15 h0.8 r270
  text "GPIO37" at 25.45,26.05 h0.8 r270
  text "GPIO35" at 27.95,26.05 h0.8 r270
  text "GPIO45" at 30.85,26.05 h0.8 r270
  text "GPIO33" at 46.45,26.05 h0.8 r270
  text "GPIO38" at 51.05,26.05 h0.8 r270
  text "7" at 56.15,24.25 h0.8 r270
  text "GPIO44/RX" at 58.75,23.65 h0.8 r270
  text "GPIO43/TX" at 60.85,23.622 h0.8 r270
  text "12" at 62.45,23.35 h0.8 r270
  text "15" at 29.55,22.25 h0.8 r270
  text "8" at 53.55,22.25 h0.8 r270
  text "9" at 61.55,22.15 h0.8 r270
  text "GND" at 27.45,22.05 h0.8 r270
  text "4" at 57.65,21.15 h0.8 r270
  text "5" at 63.15,20.75 h0.8 r270
  text "10" at 59.55,20.55 h0.8 r270
  text "6" at 56.45,19.65 h0.8 r270
  text "UBXH60-0000888" at 22.98,18.93 h0.8 r270
  text "13" at 65.15,18.25 h0.8 r270
  text "1" at 68.15,17.75 h0.8 r270
  text "GPIO4" at 33.45,17.45 h0.8 r270
  text "GPIO9" at 35,17.45 h0.8 r270
  text "GPIO36" at 25.4,17.4 h0.8 r270
  text "3V3" at 28.15,17.4 h0.8 r270
  text "IOREF" at 29.9,17.4 h0.8 r270
  text "GPIO18" at 46.65,17.4 h0.8 r270
  text "GPIO12" at 48.4,17.4 h0.8 r270
  text "GPIO10" at 50.9,17.4 h0.8 r270
  text "5V" at 52.9,17.4 h0.8 r270
  text "RST" at 54.65,17.4 h0.8 r270
  text "VIN" at 60.9,17.4 h0.8 r270
  text "GPIO13" at 38.93,17.387 h0.8 r270
  text "GPIO11" at 42.65,17.2 h0.8 r270
  text "16" at 24.258,17.119 h0.8 r270
  text "GND" at 57.59,17.01 h0.8 r270
  text "GPIO17" at 44.6,16.9 h0.8 r270
  text "30" at 62.296,16.873 h0.8 r270
Drill Guide:
  drawing of 347 lines, arcs and shapes, not listed
  text "Layer" at 24.068,113.076 h1.52
  text "Name" at 34.48,113.076 h1.52
  text "Material" at 68.253,113.076 h1.52
  text "Thickness" at 90.091,113.076 h1.52
  text "Constant" at 106.596,113.076 h1.52
  text "Board Layer Stack" at 121.071,113.076 h1.52
  text "Top Overlay" at 34.48,110.028 h1.52
  text "Top Solder" at 34.48,106.98 h1.52
  text "Solder Resist" at 68.253,106.98 h1.52
  text "0,40mil" at 90.091,106.98 h1.52
  text "3.5" at 106.596,106.98 h1.52
  text "Top Surface Finish" at 34.48,103.932 h1.52
  text "Nickel, Gold" at 68.253,103.932 h1.52
  text "0,16mil" at 90.091,103.932 h1.52
  text "1" at 24.068,100.884 h1.52
  text "Top Layer" at 34.48,100.884 h1.52
  text "CF-003" at 68.253,100.884 h1.52
  text "1,38mil" at 90.091,100.884 h1.52
  text "Dielectric 2" at 34.48,97.836 h1.52
  text "Prepreg 1080" at 68.253,97.836 h1.52
  text "7,09mil" at 90.091,97.836 h1.52
  text "3.77" at 106.596,97.836 h1.52
  text "2" at 24.068,94.788 h1.52
  text "Layer 2" at 34.48,94.788 h1.52
  text "CF-003" at 68.253,94.788 h1.52
  text "0,71mil" at 90.091,94.788 h1.52
  text "Dielectric10" at 34.48,91.74 h1.52
  text "Core-039" at 68.253,91.74 h1.52
  text "78,96mil" at 90.091,91.74 h1.52
  text "4.8" at 106.596,91.74 h1.52
  text "3" at 24.068,88.692 h1.52
  text "Layer 3" at 34.48,88.692 h1.52
  text "CF-003" at 68.253,88.692 h1.52
  text "0,71mil" at 90.091,88.692 h1.52
  text "Dielectric 7" at 34.48,85.644 h1.52
  text "Prepreg 1080" at 68.253,85.644 h1.52
  text "7,09mil" at 90.091,85.644 h1.52
  text "3.77" at 106.596,85.644 h1.52
  text "4" at 24.068,82.596 h1.52
  text "Bottom Layer" at 34.48,82.596 h1.52
  text "CF-003" at 68.253,82.596 h1.52
  text "1,38mil" at 90.091,82.596 h1.52
  text "Bottom Surface Finish" at 34.48,79.548 h1.52
  text "Nickel, Gold" at 68.253,79.548 h1.52
  text "0,16mil" at 90.091,79.548 h1.52
  text "Bottom Solder" at 34.48,76.5 h1.52
  text "Solder Resist" at 68.253,76.5 h1.52
  text "0,40mil" at 90.091,76.5 h1.52
  text "3.5" at 106.596,76.5 h1.52
  text "Bottom Overlay" at 34.48,73.452 h1.52
Mechanical 1:
  lines w0.5: 10,18 10,21.09 10,27.09 10,30 22,30 22,33 71.5,33 71.5,15 22,15 22,18 10,18
Constraint:
  lines w0.05: 56.75,18.4 71.452,18.4 71.452,29.202 56.75,29.202 56.75,18.4
PIN_NUM:
  text "U4" at 49.15,24.75 h0.8
  text "U3" at 39.65,24.45 h0.8
  text "F1" at 26.55,21.35 h0.8
  text "J6" at 22.85,21.25 h0.8
  text "U1" at 32.75,19.45 h0.8
  text "R1" at 24.65,19.25 h0.4
  text "SW1" at 48.95,18.45 h0.8
  text "SW2" at 40.35,18.25 h0.8
  text "D1" at 24.9,17.7 h0.4
  text "R4" at 66.45,16.35 h0.4
  text "R7" at 66.45,15.55 h0.4
Drill Drawing:
  circle w0.254: c24.956,54.21 r0.847
  lines w0.254: 24.109,45.744 24.956,46.167 25.803,45.744 25.379,46.59 25.803,47.437 24.956,47.013 24.109,47.437 24.533,46.59 24.109,45.744 ; 24.109,49.554 25.803,49.554 25.803,51.247 24.109,51.247 24.109,49.554 ; 24.109,58.867 25.803,58.867 24.956,57.174 24.109,58.867
  lines w0.381: 22.591,44.601 292.517,44.601 ; 22.591,59.841 292.517,59.841 ; 36.583,40.791 36.583,63.651 ; 51.819,40.791 51.819,63.651 ; 80.005,40.791 80.005,63.651 ; 92.854,40.791 92.854,63.651 ; 111.492,40.791 111.492,63.651 ; 149.581,40.791 149.581,63.651 ; 164.563,40.791 164.563,63.651 ; 183.506,40.791 183.506,63.651 ; 201.535,40.791 201.535,63.651 ; 223.627,40.791 223.627,63.651 ; 257.501,40.791 257.501,63.651 ; 22.591,40.791 292.517,40.791 292.517,63.651 22.591,63.651 22.591,40.791
  text "Symbol" at 24.877,60.984 h1.83
  text "Count" at 37.726,60.984 h1.83
  text "Hole Size" at 52.962,60.984 h1.83
  text "Plated" at 81.148,60.984 h1.83
  text "Hole Type" at 93.997,60.984 h1.83
  text "Drill Layer Pair" at 112.635,60.984 h1.83
  text "Via/Pad" at 150.724,60.984 h1.83
  text "Pad Shape" at 165.706,60.984 h1.83
  text "Template" at 184.649,60.984 h1.83
  text "Description" at 202.678,60.984 h1.83
  text "Hole Tolerance (+)" at 224.77,60.984 h1.83
  text "Hole Tolerance (-)" at 258.644,60.984 h1.83
  text "3" at 37.726,57.174 h1.52
  text "1,000mm (39,37mil)" at 52.962,57.174 h1.52
  text "PTH" at 81.148,57.174 h1.52
  text "Round" at 93.997,57.174 h1.52
  text "Top Layer - Bottom Layer" at 112.635,57.174 h1.52
  text "Pad" at 150.724,57.174 h1.52
  text "Rounded" at 165.706,57.174 h1.52
  text "c100h100p-1" at 184.649,57.174 h1.52
  text "4" at 37.726,53.364 h1.52
  text "1,800mm (70,87mil)" at 52.962,53.364 h1.52
  text "NPTH" at 81.148,53.364 h1.52
  text "Round" at 93.997,53.364 h1.52
  text "Top Layer - Bottom Layer" at 112.635,53.364 h1.52
  text "Pad" at 150.724,53.364 h1.52
  text "Rounded" at 165.706,53.364 h1.52
  text "c180hn180" at 184.649,53.364 h1.52
  text "30" at 37.726,49.554 h1.52
  text "0,914mm (35,98mil)" at 52.962,49.554 h1.52
  text "PTH" at 81.148,49.554 h1.52
  text "Round" at 93.997,49.554 h1.52
  text "Top Layer - Bottom Layer" at 112.635,49.554 h1.52
  text "Pad" at 150.724,49.554 h1.52
  text "(Mixed)" at 165.706,49.554 h1.52
  text "(Mixed)" at 184.649,49.554 h1.52
  text "219" at 37.726,45.744 h1.52
  text "0,300mm (11,81mil)" at 52.962,45.744 h1.52
  text "PTH" at 81.148,45.744 h1.52
  text "Round" at 93.997,45.744 h1.52
  text "Top Layer - Bottom Layer" at 112.635,45.744 h1.52
  text "Via" at 150.724,45.744 h1.52
  text "Rounded" at 165.706,45.744 h1.52
  text "v550h0300" at 184.649,45.744 h1.52
  text "TH_300_550_um" at 202.678,45.744 h1.52
  text "0,100mm (3,94mil)" at 224.77,45.744 h1.52
  text "0,100mm (3,94mil)" at 258.644,45.744 h1.52
  text "256 Total" at 37.726,41.934 h1.52
Outline:
  lines w0.2: 22,15 22,18 22,30 22,33 71.5,33 71.5,15 22,15

## Text inside footprints (layer, text, board x,y; h text height)
J2: Assembly Notes "Card edge" at 9.345,20.844 h1.57 r90